# Altium PCB AZ_elec2.PcbDoc
Units mil, origin at the board's own origin, x right, y up, seen from the top; angles counter-clockwise.
Board outline 5050 x 3020 mil, 2 copper layers (Top Layer, Bottom Layer); 34 components, 30 nets, 93 pads, 0 vias.
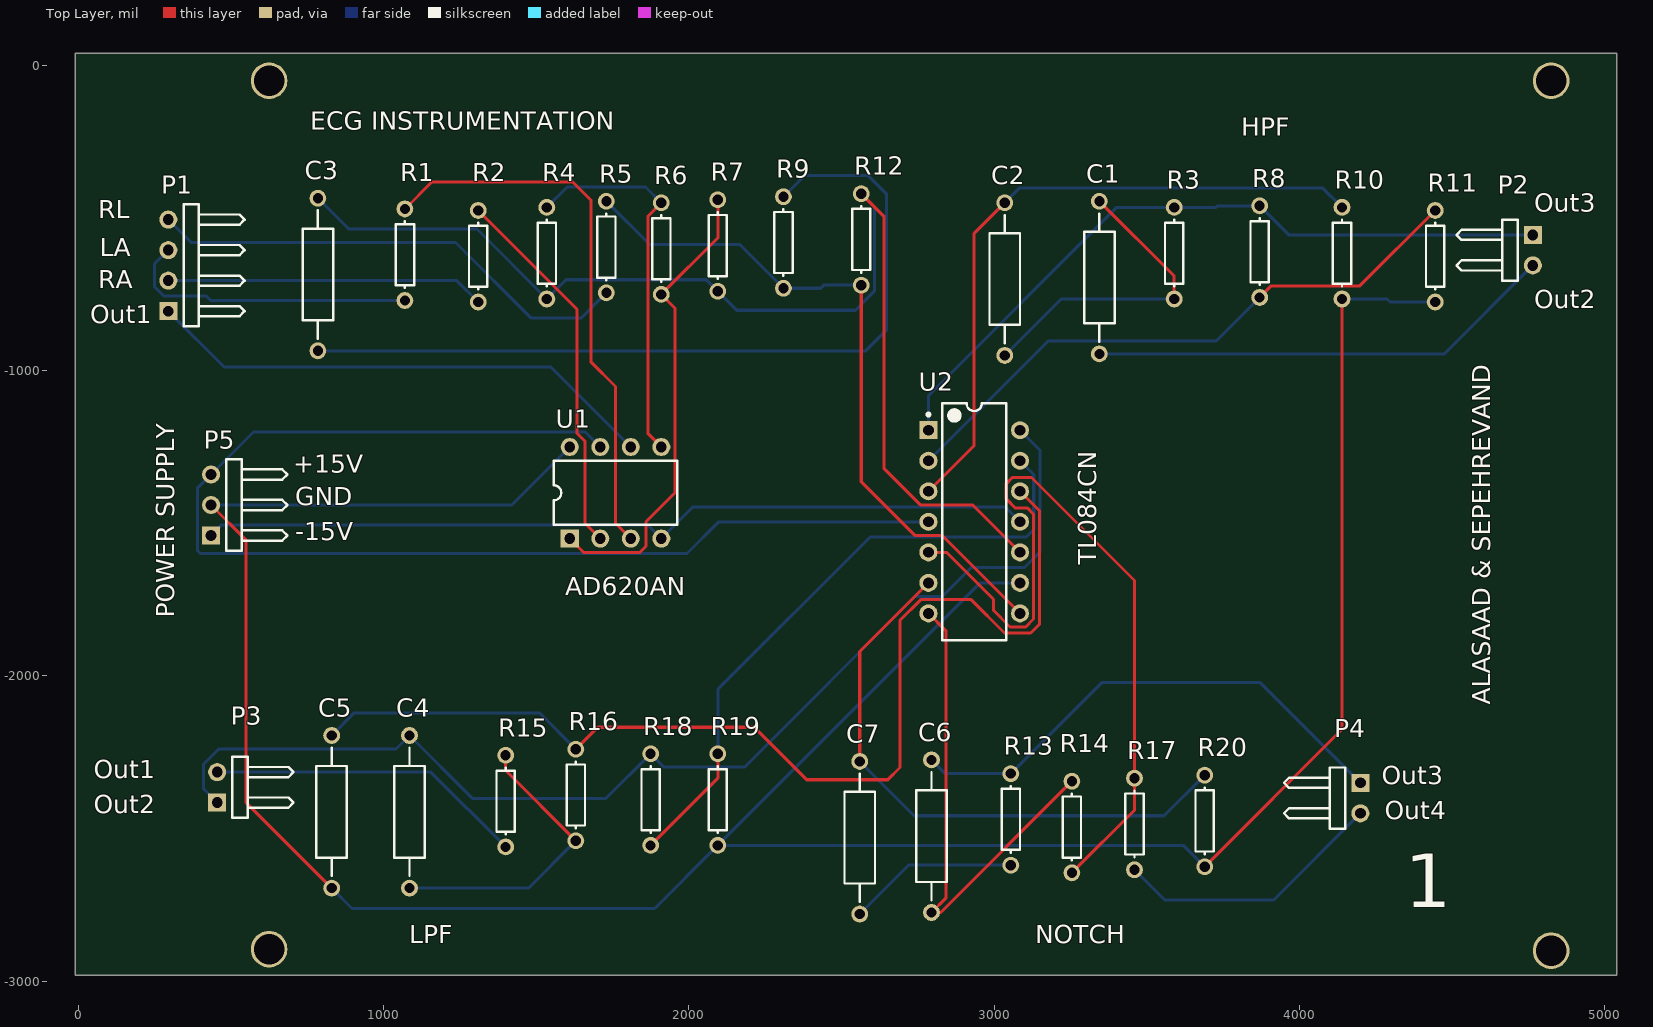
[diagram p0: Top Layer view]
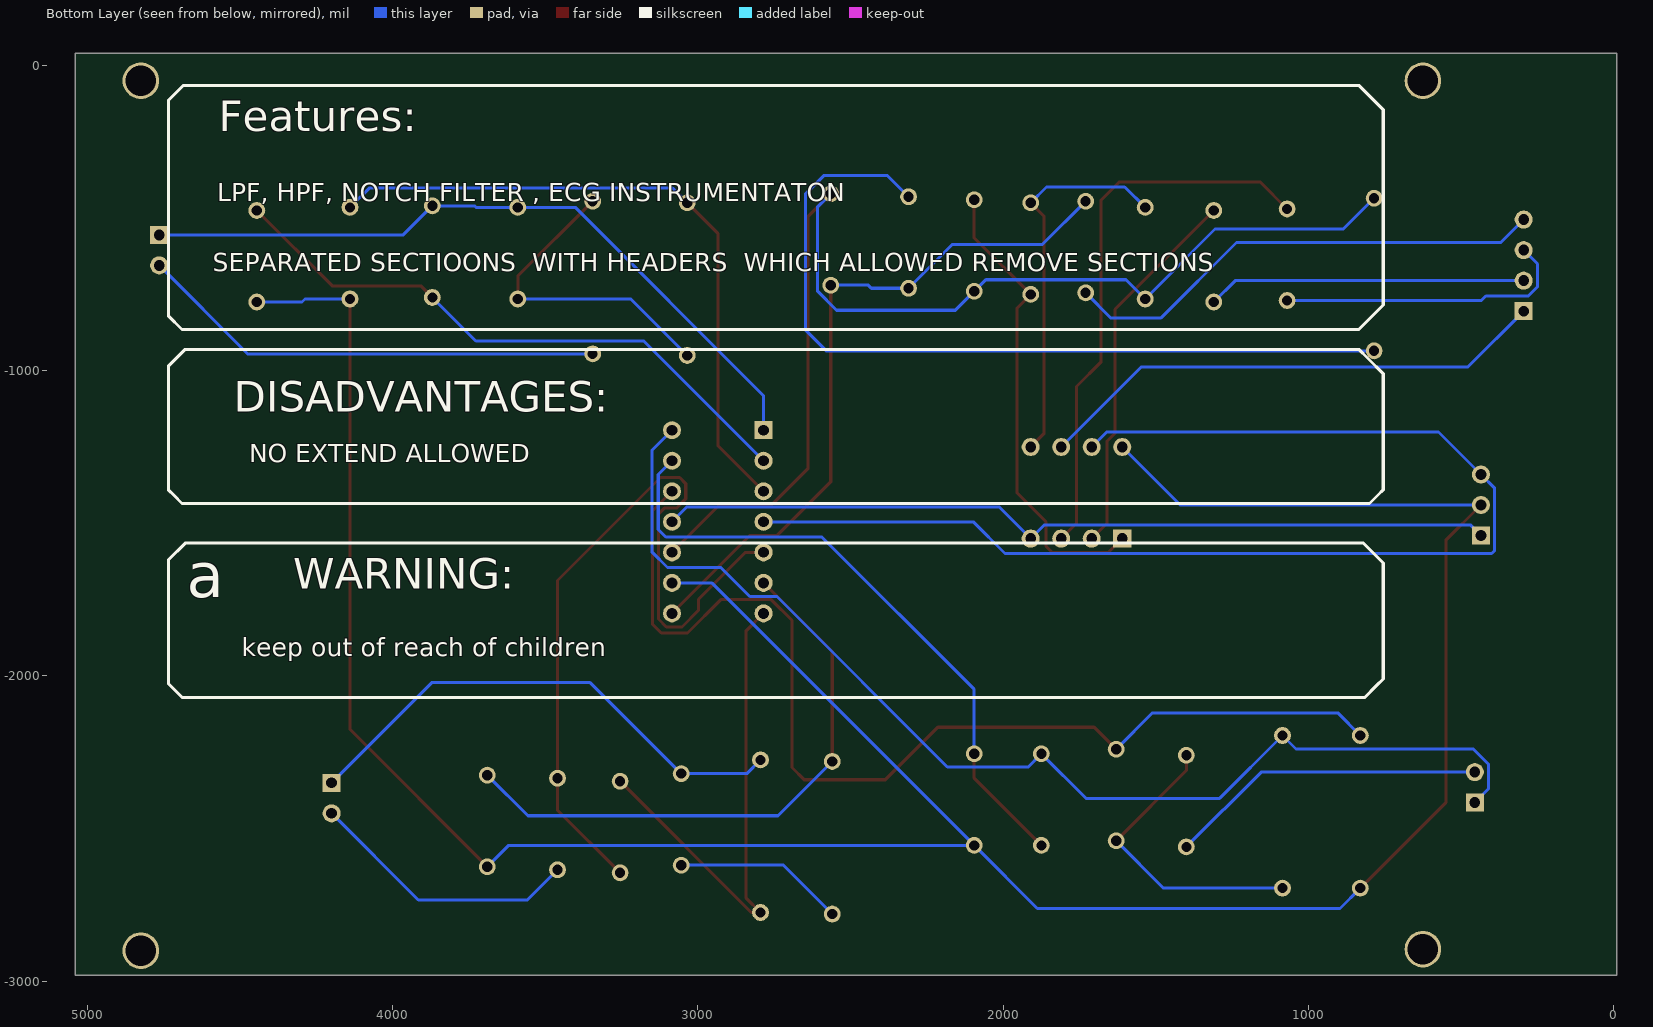
[diagram p1: Bottom Layer view, seen from below]

## Layer stack, top to bottom
Top Solder: solder mask 0.4, Solder Resist, Dk 3.5
Top Layer: signal copper 1.4
Dielectric 1: dielectric 12.6, FR-4, Dk 4.8
Bottom Layer: signal copper 1.4
Bottom Solder: solder mask 0.4, Solder Resist, Dk 3.5

## Board outline
-10,40 -10,-2980 5040,-2980 5040,40

## Design rules (kind name [scope] priority, off if disabled: settings)
Clearance [All] p1: gap=10 ignorepadtopadclearanceinfootprint=FALSE except(0: Arc-Hole Track-Hole SMDPad-Hole THPad-Hole Via-Hole Fill-Hole Poly-Hole Region-Hole Text-Hole)
PolygonConnect [All] p1: connectstyle=Relief reliefconductorwidth=10 reliefentries=4 polygonreliefangle="90 Angle" airgapwidth=10
RoomDefinition AZ_elec2 [InComponentClass('AZ_elec2')] p1: confinementstyle=ConfineIn formatcopy=TRUE lockcomponents=FALSE outline 115,-4000 2115,-4000 2115,-3000 115,-3000
RoutingVias [All] p1: holewidth=28 width=50 viastyle="Through Hole" minholewidth=28 minwidth=50 maxholewidth=28 maxwidth=50
SolderMaskExpansion [All] p1: expansion=4
Width [All] p1: maxlimit=10 minlimit=10 preferedwidth=10
30 further rules are at their usual default settings.

## Components (designator, comment, footprint, x,y, rotation, side; value= is the part's Value field where it differs from the comment)
C1 "Cap" AXIAL-0.5 3345,-695 r90 top value=22u
C2 "Cap" AXIAL-0.5 3035,-700 r90 top value=22u
C3 "Cap" AXIAL-0.5 785,-685 r90 top value=100n
C4 "Cap" AXIAL-0.5 1085,-2445 r90 top value=22n
C5 "Cap" AXIAL-0.5 830,-2445 r90 top value=220n
C6 "Cap" AXIAL-0.5 2795,-2525 r90 top value=47n
C7 "Cap" AXIAL-0.5 2560,-2530 r90 top value=47n
P1 "" HDR1X4H 295,-805 r90 top
P2 "" HDR1X2H 4765,-555 r270 top
P3 "" HDR1X2H 455,-2415 r90 top
P4 "" HDR1X2H 4200,-2350 r270 top
P5 "" HDR1X3H 435,-1540 r90 top
R1 "Res1" AXIAL-0.3 1070,-620 r90 top value=220K
R2 "Res1" AXIAL-0.3 1310,-625 r90 top value=220K
R3 "Res1" AXIAL-0.3 3590,-615 r90 top value=560K
R4 "Res1" AXIAL-0.3 1535,-615 r90 top value=22K
R5 "Res1" AXIAL-0.3 1730,-595 r90 top value=220K
R6 "Res1" AXIAL-0.3 1910,-600 r90 top value=6.8K
R7 "Res1" AXIAL-0.3 2095,-590 r90 top value=22K
R8 "Res1" AXIAL-0.3 3870,-610 r90 top value=100K
R9 "Res1" AXIAL-0.3 2310,-580 r90 top value=10K
R10 "Res1" AXIAL-0.3 4140,-615 r90 top value=330K
R11 "Res1" AXIAL-0.3 4445,-625 r90 top value=10K
R12 "Res1" AXIAL-0.3 2565,-570 r90 top value=1Meg
R13 "Res1" AXIAL-0.3 3055,-2470 r90 top value=68K
R14 "Res1" AXIAL-0.3 3255,-2495 r90 top value=10K
R15 "Res1" AXIAL-0.3 1400,-2410 r90 top value=68K
R16 "Res1" AXIAL-0.3 1630,-2390 r90 top value=8.2K
R17 "Res1" AXIAL-0.3 3460,-2485 r90 top value=10K
R18 "Res1" AXIAL-0.3 1875,-2405 r90 top value=100K
R19 "Res1" AXIAL-0.3 2095,-2405 r90 top value=10K
R20 "Res1" AXIAL-0.3 3690,-2475 r90 top value=68K
U1 "AD620AN" N-8 1760,-1400 r0 top
U2 "TL084CN" TI-N14 2935,-1495 r0 top

## Footprints (in the part's own frame and the unit in brackets; to place one, negate y for a bottom-side part, rotate by r counter-clockwise, add the part's x,y. Pads: shape width x height; smd on the part's side, far side on the other; paste and mask are expansions set on the pad)
AXIAL-0.3 [mm] "Axial Device, Thru-Hole; 2 Leads; 0.3 in Pin Spacing"
  round 1.4 hole 0.85: 1(-3.81,0) 2(3.81,0)
  silkscreen extent -2.77,-0.76 2.77,0.76
AXIAL-0.5 [mm] "Axial Device, Thru-Hole; 2 Leads; 0.5 in Pin Spacing"
  round 1.4 hole 0.85: 1(-6.35,0) 2(6.35,0)
  silkscreen extent -5.33,-1.27 5.33,1.27
HDR1X2H [mm] "Connector; Header; 2 Position; Right Angle"
  rect 1.5x1.5 hole 0.9: 1(0,0)
  round 1.5 hole 0.9: 2(2.54,0)
  silkscreen extent -1.27,-6.35 3.81,-1.27
HDR1X3H [mm] "Connector; Header; 3 Position; Right Angle"
  rect 1.5x1.5 hole 0.9: 1(0,0)
  round 1.5 hole 0.9: 2(2.54,0) 3(5.08,0)
  silkscreen extent -1.27,-6.35 6.35,-1.27
HDR1X4H [mm] "Connector; Header; 4 Position; Right Angle"
  rect 1.5x1.5 hole 0.9: 1(0,0)
  round 1.5 hole 0.9: 2(2.54,0) 3(5.08,0) 4(7.62,0)
  silkscreen extent -1.27,-6.35 8.89,-1.27
N-8 [mm] "DIP; 8 Leads; Row Spacing 7.62 mm; Pitch 2.54 mm"
  rect 1.5x1.5 hole 0.9: 1(-3.81,-3.81)
  round 1.5 hole 0.9: 2(-1.27,-3.81) 3(1.27,-3.81) 4(3.81,-3.81) 5(3.81,3.81) 6(1.27,3.81) 7(-1.27,3.81) 8(-3.81,3.81)
  silkscreen extent -5.15,-2.65 5.15,2.65
TI-N14 [mm] "DIP, 14-Leads, Body 19.305x6.35 mm, Pitch 2.54 mm"
  rect 1.5x1.5 hole 0.9: 1(-3.81,7.62)
  round 1.5 hole 0.9: 2(-3.81,5.08) 3(-3.81,2.54) 4(-3.81,0) 5(-3.81,-2.54) 6(-3.81,-5.08) 7(-3.81,-7.62) 8(3.81,-7.62) 9(3.81,-5.08) 10(3.81,-2.54) 11(3.81,0) 12(3.81,2.54) 13(3.81,5.08) 14(3.81,7.62)
  silkscreen extent -3.93,-9.85 2.65,9.85, body extent -3.3,-9.85 3.3,9.85, height 5.08

## Part data
C1 C2 C3 C4 C5 C6 C7: "Capacitor", LatestRevisionDate=17-Jul-2002, LatestRevisionNote="Re-released for DXP Platform.", PackageDescription="Radial Cap, Thru-Hole; 2 Leads; 0.3 in Pin Spacing", PackageReference=RAD-0.3, Published=8-Jun-2000, Publisher="Altium Limited"
P1: library part "Header 4H", "Header, 4-Pin, Right Angle", LatestRevisionDate=17-Jul-2002, LatestRevisionNote="Re-released for DXP Platform.", Publisher="Altium Limited"
P2 P3 P4: library part "Header 2H", "Header, 2-Pin, Right Angle", LatestRevisionDate=17-Jul-2002, LatestRevisionNote="Re-released for DXP Platform.", Publisher="Altium Limited"
P5: library part "Header 3H", "Header, 3-Pin, Right Angle", LatestRevisionDate=17-Jul-2002, LatestRevisionNote="Re-released for DXP Platform.", Publisher="Altium Limited"
R1 R2 R3 R4 R5 R6 R7 R8 R9 R10 R11 R12 R13 R14 R15 R16 R17 R18 R19 R20: "Resistor", LatestRevisionDate=17-Jul-2002, LatestRevisionNote="Re-released for DXP Platform.", PackageDescription="Axial Device, Thru-Hole; 2 Leads; 0.3 in Pin Spacing", PackageReference=AXIAL-0.3, Published=8-Jun-2000, Publisher="Altium Limited"
U1: "Low-Cost, Low-Power Instrumentation Amplifier", ComponentLink1Description="Manufacturer Link", ComponentLink1URL=http://www.analog.com/en/prod/0%2C2877%2CAD620%2C00.html, ComponentLink2Description=Datasheet, ComponentLink2URL=http://www.analog.com/UploadedFiles/Data_Sheets/897653854AD620_g.pdf, DatasheetVersion="REV.D 1998", LatestRevisionDate=04-Mar-2005, LatestRevisionNote="Stylized 3D Model Added.", PackageDescription="DIP; 8 Leads; Row Spacing 7.62 mm; Pitch 2.54 mm", PackageReference=N-8, PackageVersion=revA, Published=8-Jun-2000, Publisher="Altium Limited"
U2: "JFET-Input Operational Amplifier, 7 to 36 V, 0 to 70 degC, 14-pin DIP (N14), Pb-Free (RoHS)", Manufacturer="Texas Instruments", Rating=Catalog, Supplier Part Number 1=296-1784-5-ND, Total Supply Voltage(Max)(+5V is 5, +/-5V is 10)=36, Total Supply Voltage(Min)(+5V is 5, +/-5V is 10)=7, CMRR(Min)(dB)=70, Code_JEDEC=MS-001, ComponentLink1Description="Manufacturer URL", ComponentLink1URL=http://www.ti.com/, ComponentLink2Description=Datasheet, ComponentLink2URL=http://www.ti.com/lit/ds/symlink/tl084.pdf, ComponentLink3Description="Package Specification", ComponentLink3URL=http://www.ti.com/lit/ml/mpdi002c/mpdi002c.pdf, DatasheetVersion=SLOS081G, Eco-Plan="Pb-Free (RoHS)", GBW(Typ)(MHz)=3, IIB(Max)(pA)=400, Iq per channel(Max)(mA)=2.8, Mounting Technology="Through Hole", Number of Channels=4, Offset Drift(Typ)(uV/C)=18, PackageDescription="14-Pin Plastic In-Line, Body 19.305 x 6.35 mm, Pitch 2.54 mm", PackageReference=N14, PackageVersion="4040049/E, 12/2002", PartNumber=TL084CN, Slew Rate(Typ)(V/us)=13, Sub Family="General Purpose Amplifier, High Supply Voltage Amplifier (>=30V)", Supplier 1=Digi-Key, Supplier 2=Farnell, Supplier 3=Newark, Supplier 4=Mouser, Supplier Part Number 2=1106020, Supplier Part Number 3=08F9374, Supplier Part Number 4=595-TL084CN, Vio (25C)(Max)(mV)=15, Vn at 1kHz(Typ)(nV/rtHz)=18

## Free pads (board coordinates)
  round 120 hole 100: 1(625,-50) 2(625,-2895) 3(4825,-2900) 4(4825,-50)

## Nets (pads, with @x,y where several pads share a name; then routed paths per layer and width w, separated by ;. In a path a pad name is that pad's centre, name@x,y a point inside that pad or via, vN(x,y) a via of type N, cw(c..) or ccw(c..) an arc to the next point about the centre after c; other vN are vias at no path point)
16: R14.1 R17.2 U2.5 | length 2592.2
  Top Layer w10: U2.5 2844,-1595 2998,-1749 2998,-1785 3052.53,-1839.53 3103.47,-1839.53 3129.53,-1813.47 3129.53,-1470 3110,-1450.47 3070.47,-1450.47 3040,-1420 3040,-1370 3060,-1350 3123,-1350 3460,-1687 R17.2 3460,-2440 R14.1
17: C7.2 R20.2 U2.6 | length 1937
  Top Layer w10: C7.2 2560,-1920 U2.6
  Bottom Layer w10: C7.2 2738,-2458 3557,-2458 R20.2
18: C6.1 R14.2 U2.7 | length 1661.2
  Top Layer w10: U2.7 2842,-1852 2842,-2728 C6.1 2825,-2775 R14.2
NetC1_1: C1.1 P2.2 | length 1540.1
  Bottom Layer w10: C1.1 4475,-945 P2.2
NetC1_2: C1.2 C2.1 R3.1 | length 1053.1
  Top Layer w10: C1.2 3590,-690 R3.1
  Bottom Layer w10: C2.1 3220,-765 R3.1
NetC2_2: C2.2 R10.2 U2.3 | length 2199.5
  Top Layer w10: U2.3 2935,-1245 2935,-550 C2.2
  Bottom Layer w10: C2.2 3083,-402 4077,-402 R10.2
NetC3_1: C3.1 R9.2 | length 2727.8
  Bottom Layer w10: C3.1 2580,-935 2647,-868 2647,-420 2588,-361 2379,-361 R9.2
NetC3_2: C3.2 R4.1 R7.1 R12.2 U2.10 | length 3881.3
  Top Layer w10: R12.2 2639,-494 2639,-1320 2758.53,-1439.53 2929.53,-1439.53 U2.10
  Bottom Layer w10: C3.2 886,-536 1306,-536 R4.1 1598,-702 2057,-702 R7.1 2157,-802 2546,-802 2608,-740 2608,-463 R12.2
NetC4_1: C4.1 R15.2 R16.1 | length 984.5
  Top Layer w10: R15.2 1400,-2310 R16.1
  Bottom Layer w10: C4.1 1475,-2695 R16.1
NetC4_2: C4.2 P3.1 R18.2 U2.14 | length 3805.3
  Bottom Layer w10: P3.1 410,-2370 410,-2289 460,-2239 1041,-2239 C4.2 1291,-2401 1729,-2401 R18.2 1918,-2298 2183,-2298 2741,-1740 2830,-1740 2925,-1645 3100,-1645 3150,-1595 3150,-1260 U2.14
NetC5_1: C5.1 P5.2 R10.1 R11.1 R19.1 R20.1 U1.8 U2.9 | length 9376.6
  Top Layer w10: P5.2 550,-1555 550,-2415 C5.1 ; R20.1 4140,-2175 R10.1
  Bottom Layer w10: P5.2 1420,-1440 U1.8 ; C5.1 897,-2762 1888,-2762 R19.1 ; U2.9 2955,-1695 R19.1 ; R20.1 3620,-2555 R19.1 ; R10.1 4287,-765 4297,-775 R11.1
NetC5_2: C5.2 R16.2 U2.12 | length 3546.6
  Top Layer w10: R16.2 1702,-2168 2214,-2168 2386,-2340 2652,-2340 2692,-2300 2692,-1818 2760,-1750 2925,-1750 3034.53,-1859.53 3120,-1859.53 3149.53,-1830 3149.53,-1459.53 U2.12
  Bottom Layer w10: C5.2 904,-2121 1511.01,-2121 R16.2
NetC6_2: C6.2 P4.1 R13.2 | length 1682.9
  Bottom Layer w10: C6.2 2840,-2320 R13.2 3353,-2022 3872,-2022 P4.1
NetC7_1: C7.1 R13.1 | length 561.3
  Bottom Layer w10: C7.1 2720,-2620 R13.1
NetP1_1: P1.1 U1.6 | length 1699.3
  Bottom Layer w10: P1.1 478,-988 1548,-988 U1.6
NetP1_2: P1.2 R2.1 | length 1044
  Bottom Layer w10: P1.2 1240,-705 R2.1
NetP1_3: P1.3 R1.1 | length 977.3
  Bottom Layer w10: P1.3 250,-650 250,-725 280,-755 419,-755 434,-770 R1.1
NetP1_4: P1.4 R5.1 | length 1603.2
  Bottom Layer w10: P1.4 370,-580 1236,-580 1484,-828 1647,-828 R5.1
NetP2_1: P2.1 R3.2 R8.2 U2.1 | length 2390
  Bottom Layer w10: U2.1 2785,-1082 3402,-465 R3.2 3727,-465 3732,-460 R8.2 3965,-555 P2.1
NetP3_2: P3.2 R15.1 | length 1046.5
  Bottom Layer w10: P3.2 1155,-2315 R15.1
NetP4_2: P4.2 R17.1 | length 898.6
  Bottom Layer w10: R17.1 3559,-2734 3916,-2734 P4.2
NetP5_1: P5.1 U1.4 U2.11 | length 2746.5
  Bottom Layer w10: P5.1 470,-1505 1865,-1505 U1.4 2014,-1446 3036,-1446 U2.11
NetP5_3: P5.3 U1.7 U2.4 | length 4062.7
  Bottom Layer w10: U1.7 1661,-1201 574,-1201 P5.3 390,-1385 390,-1589 400,-1599 1994,-1599 2098,-1495 U2.4
NetR1_2: R1.2 U1.3 | length 1833.2
  Top Layer w10: R1.2 1158,-382 1620,-382 1679,-441 1679,-971 1760,-1052 1760,-1500 U1.3
NetR2_2: R2.2 U1.2 | length 1240.7
  Top Layer w10: R2.2 1634,-799 1634,-1205 1660,-1231 1660,-1500 U1.2
NetR4_2: R4.2 R6.2 U1.5 | length 1259.9
  Top Layer w10: U1.5 1867,-1207 1867,-493 R6.2
  Bottom Layer w10: R4.2 1602,-398 1858,-398 R6.2
NetR5_2: R5.2 R9.1 R12.1 U2.8 | length 2299.8
  Top Layer w10: R12.1 2565,-1364.06 2740.47,-1539.53 2829.53,-1539.53 U2.8
  Bottom Layer w10: R5.2 1871,-586 2166,-586 R9.1 2432,-730 2442,-720 R12.1
NetR6_1: R6.1 R7.2 U1.1 | length 1546.5
  Top Layer w10: U1.1 1655,-1595 1840,-1595 1860,-1575 1860,-1495 1955,-1400 1955,-795 R6.1 2095,-565 R7.2
NetR8_1: R8.1 R11.2 U2.2 | length 1999.7
  Top Layer w10: R8.1 3908,-722 4198,-722 R11.2
  Bottom Layer w10: U2.2 3177.56,-902.44 3727.56,-902.44 R8.1
NetR18_1: R18.1 R19.2 U2.13 | length 2097.8
  Top Layer w10: R18.1 2095,-2335 R19.2
  Bottom Layer w10: R19.2 2095,-2044 2594,-1545 3105,-1545 3130,-1520 3130,-1340 U2.13

## Other copper
Top Layer:
  rectangle: 3155,14670 3180,14690

## Silkscreen, mask and mechanical layers (free items; w line width, h text height)
Top Overlay:
  text "ECG INSTRUMENTATION" at 760,-210 h60
  text "HPF" at 3810,-230 h60
  text "Out3" at 4770,-480 h60
  text "RL" at 65,-500 h60
  text "LA" at 70,-625 h60
  text "RA" at 65,-730 h60
  text "Out2" at 4770,-795 h60
  text "Out1" at 40,-845 h60
  text "+15V" at 705,-1335 h60
  text "GND" at 710,-1440 h60
  text "-15V" at 710,-1555 h60
  text "TL084CN" at 3335,-1635 h60 r90
  text "AD620AN" at 1595,-1735 h60
  text "POWER SUPPLY" at 315,-1810 h60 r90
  text "ALASAAD & SEPEHREVAND" at 4625,-2095 h60 r90
  text "Out1" at 50,-2335 h60
  text "Out3" at 4270,-2355 h60
  text "Out2" at 50,-2450 h60
  text "Out4" at 4280,-2470 h60
  text "1" at 4345,-2815 h300
  text "LPF" at 1085,-2875 h60
  text "NOTCH" at 3135,-2875 h60
Bottom Overlay:
  lines w10: 755,-2010 777.5,-2032.5 815,-2070 4690,-2070 4715,-2045 4735,-2025 4735,-1995 4735,-1620 4680,-1565 820,-1565 790,-1595 755,-1630 755,-2010 ; 755,-1390 755,-1010 805,-960 835,-930 4680,-930 4735,-985 4735,-1360 4735,-1390 4715,-1410 4690,-1435 850,-1435 800,-1435 772.5,-1407.5 755,-1390 ; 755,-785 835,-865 4690,-865 4735,-820 4735,-115 4685,-65 835,-65 755,-145 755,-785
  text "Features:" at 4570,-215 h100
  text "LPF, HPF, NOTCH FILTER , ECG INSTRUMENTATON" at 4575,-445 h60
  text "SEPARATED SECTIOONS  WITH HEADERS  WHICH ALLOWED REMOVE SECTIONS" at 4590,-675 h60
  text "DISADVANTAGES:" at 4520,-1135 h100
  text "NO EXTEND ALLOWED" at 4470,-1300 h60
  text "WARNING:" at 4325,-1715 h100
  text "a" at 4675,-1790 h250
  text "keep out of reach of children" at 4495,-1935 h60